# EAGLE board pololu-steppers-signal-side (EAGLE 5.03)
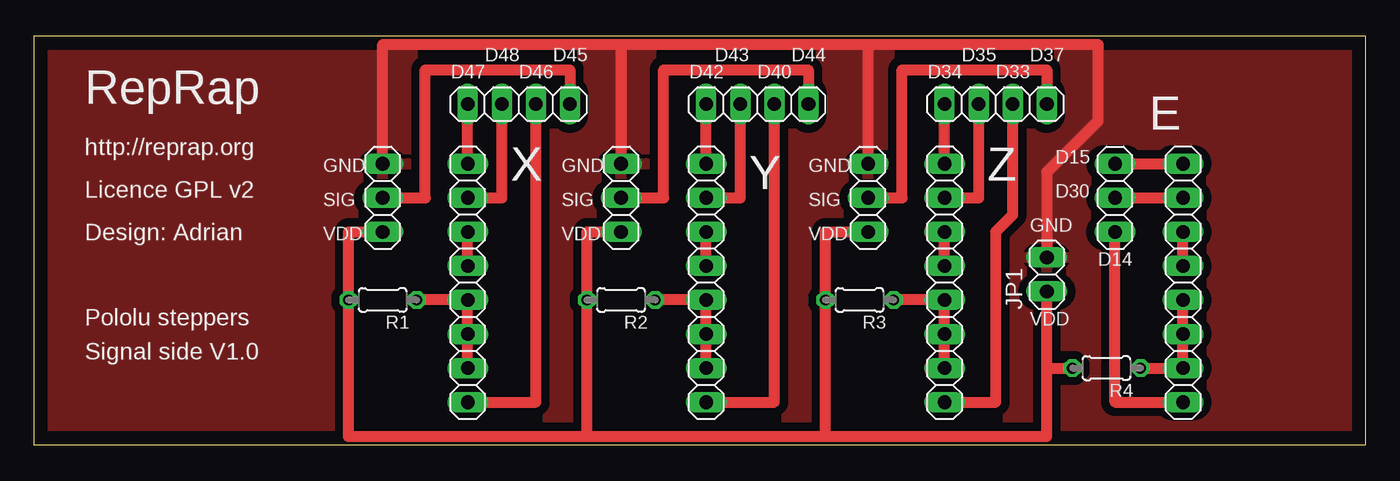
[diagram p0: board, top side]

Size 99.36 x 30.47 mm. Coordinates in mm from the lower left corner, seen from the top.
Outline: 0,0 99.36,0 99.36,30.47 0,30.47 0,0
Copper layers (1*16): Top 0.035mm / dielectric 1.5mm / Bottom 0.035mm
Design rules "default": minimum track width 10mil, minimum drill 24mil, track to track 8mil, track to pad 8mil, pad to pad 8mil, via to via 8mil, smd to smd 8mil, copper to edge 40mil, drill to drill 8mil, minimum pad ring 10mil, minimum via ring 8mil, stop-mask expansion 4mil, vias tented up to drill 0mil, thermal gap 10mil

## Footprints (pad centres in the part's own frame; a part is rotated, then mirrored left to right if it is on the bottom)
1X02 = drill 1.016 long: 1 -1.27,0; 2 1.27,0
1X04 = drill 1.016 long: 1 -3.81,0; 2 -1.27,0; 3 1.27,0; 4 3.81,0
1X03 = drill 1.016 long: 1 -2.54,0; 2 0,0; 3 2.54,0
1X08 = drill 1.016 long: 1 -8.89,0; 2 -6.35,0; 3 -3.81,0; 4 -1.27,0; 5 1.27,0; 6 3.81,0; 7 6.35,0; 8 8.89,0
0204/5 = drill 0.813 octagon: 1 -2.54,0; 2 2.54,0

## Placement (x,y rotation side)
JP1  [1X02]  75.56,12.7 90 top
JP2  [1X04]  36.2,25.4 180 top
JP3  [1X03]  26.04,18.42 90 top
JP5  [1X04]  53.98,25.4 180 top
JP6  [1X03]  43.81,18.42 90 top
JP8  [1X04]  71.75,25.4 180 top
JP9  [1X03]  62.23,18.42 90 top
JP12  [1X03]  80.64,18.42 90 top
JP14  [1X08]  32.38,12.07 270 top
JP16  [1X08]  50.16,12.07 270 top
JP17  [1X08]  67.95,12.07 270 top
JP18  [1X08]  85.72,12.07 270 top
R1  100k  [0204/5]  26.04,10.79 180 top
R2  100k  [0204/5]  43.81,10.79 180 top
R3  100k  [0204/5]  61.59,10.79 180 top
R4  100k  [0204/5]  80.01,5.71 180 top

## Library data of the parts
JP1-JP3 JP5 JP6 JP8 JP9 JP12 JP14 JP16-JP18 = pinhead
R1-R4 = rcl

## Nets
GND: JP1.2 JP3.3 JP6.3 JP9.3
N$1: JP16.5 JP16.6 JP16.7 R2.1
N$2: JP16.3 JP16.4
N$3: JP2.4 JP14.1
N$6: JP14.5 JP14.6 JP14.7 R1.1
N$7: JP14.3 JP14.4
N$14: JP2.3 JP14.2
N$15: JP2.2 JP14.8
N$16: JP2.1 JP3.2
N$17: JP5.4 JP16.1
N$18: JP5.3 JP16.2
N$19: JP5.2 JP16.8
N$20: JP5.1 JP6.2
N$21: JP17.5 JP17.6 JP17.7 R3.1
N$22: JP17.3 JP17.4
N$27: JP8.4 JP17.1
N$28: JP8.3 JP17.2
N$29: JP8.2 JP17.8
N$30: JP8.1 JP9.2
N$31: JP18.5 JP18.6 JP18.7 R4.1
N$32: JP18.3 JP18.4
N$37: JP12.3 JP18.1
N$38: JP12.2 JP18.2
N$39: JP12.1 JP18.8
VCC: JP1.1 JP3.1 JP6.1 JP9.1 R1.2 R2.2 R3.2 R4.2

## Tracks (layer width: path | path; a pad name or v marks a point on that pad's centre or on a via)
GND
  Top 0.813: JP3.3 26.04,29.85 43.81,29.85 | 43.81,29.85 JP6.3 | 62.23,29.85 JP9.3 | 43.81,29.85 62.23,29.85 | JP1.2 75.56,20.32 79.38,24.13 79.38,29.85 62.23,29.85
  pour Top (isolate 0.61): -0.64,31.11 -0.64,-0.63 100.33,-0.63 100.33,31.11
N$1
  Top 0.813: R2.1 JP16.5 JP16.6 JP16.7
N$2
  Top 0.813: JP16.4 JP16.3
N$3
  Top 0.813: JP14.1 JP2.4
N$6
  Top 0.813: R1.1 JP14.5 JP14.6 JP14.7
N$7
  Top 0.813: JP14.4 JP14.3
N$14
  Top 0.813: JP2.3 34.92,18.42 JP14.2
N$15
  Top 0.813: JP2.2 37.47,3.18 JP14.8
N$16
  Top 0.813: JP2.1 40.01,27.94 29.21,27.94 29.21,18.42 JP3.2
N$17
  Top 0.813: JP16.1 JP5.4
N$18
  Top 0.813: JP5.3 52.7,18.42 JP16.2
N$19
  Top 0.813: JP5.2 55.24,3.18 JP16.8
N$20
  Top 0.813: JP5.1 57.78,27.94 46.99,27.94 46.99,18.42 JP6.2
N$21
  Top 0.813: R3.1 JP17.5 JP17.6 JP17.7
N$22
  Top 0.813: JP17.4 JP17.3
N$27
  Top 0.813: JP17.1 JP8.4
N$28
  Top 0.813: JP8.3 70.48,18.42 JP17.2
N$29
  Top 0.813: JP8.2 73.03,17.14 71.75,15.88 71.75,3.18 JP17.8
N$30
  Top 0.813: JP8.1 75.56,27.94 64.77,27.94 64.77,18.42 JP9.2
N$31
  Top 0.813: JP18.5 JP18.6 JP18.7 R4.1
N$32
  Top 0.813: JP18.4 JP18.3
N$37
  Top 0.813: JP12.3 JP18.1
N$38
  Top 0.813: JP12.2 JP18.2
N$39
  Top 0.813: JP18.8 80.64,3.18 JP12.1
VCC
  Top 0.813: JP3.1 23.5,15.88 R1.2 23.5,0.63 41.27,0.63 | 41.27,0.63 R2.2 41.27,15.88 JP6.1 | 41.27,0.63 59.06,0.63 | JP9.1 59.06,15.88 R3.2 59.06,0.63 | 75.56,5.71 75.56,0.63 59.06,0.63 | 75.56,5.71 JP1.1 | 75.56,5.71 R4.2

## Text on the board
tPlace: D48 | D45 | D43 | D44 | D35 | D37 | D47 | D46 | D42 | D40 | D34 | D33 | RepRap | E | http://reprap.org | D15 | GND | GND | GND | X | Y | Z | Licence GPL v2 | D30 | SIG | SIG | SIG | Design: Adrian | VDD | VDD | VDD | GND | D14 | Pololu steppers | VDD | Signal side V1.0